# EAGLE board CompletePCB (3) (EAGLE 9.2.1)
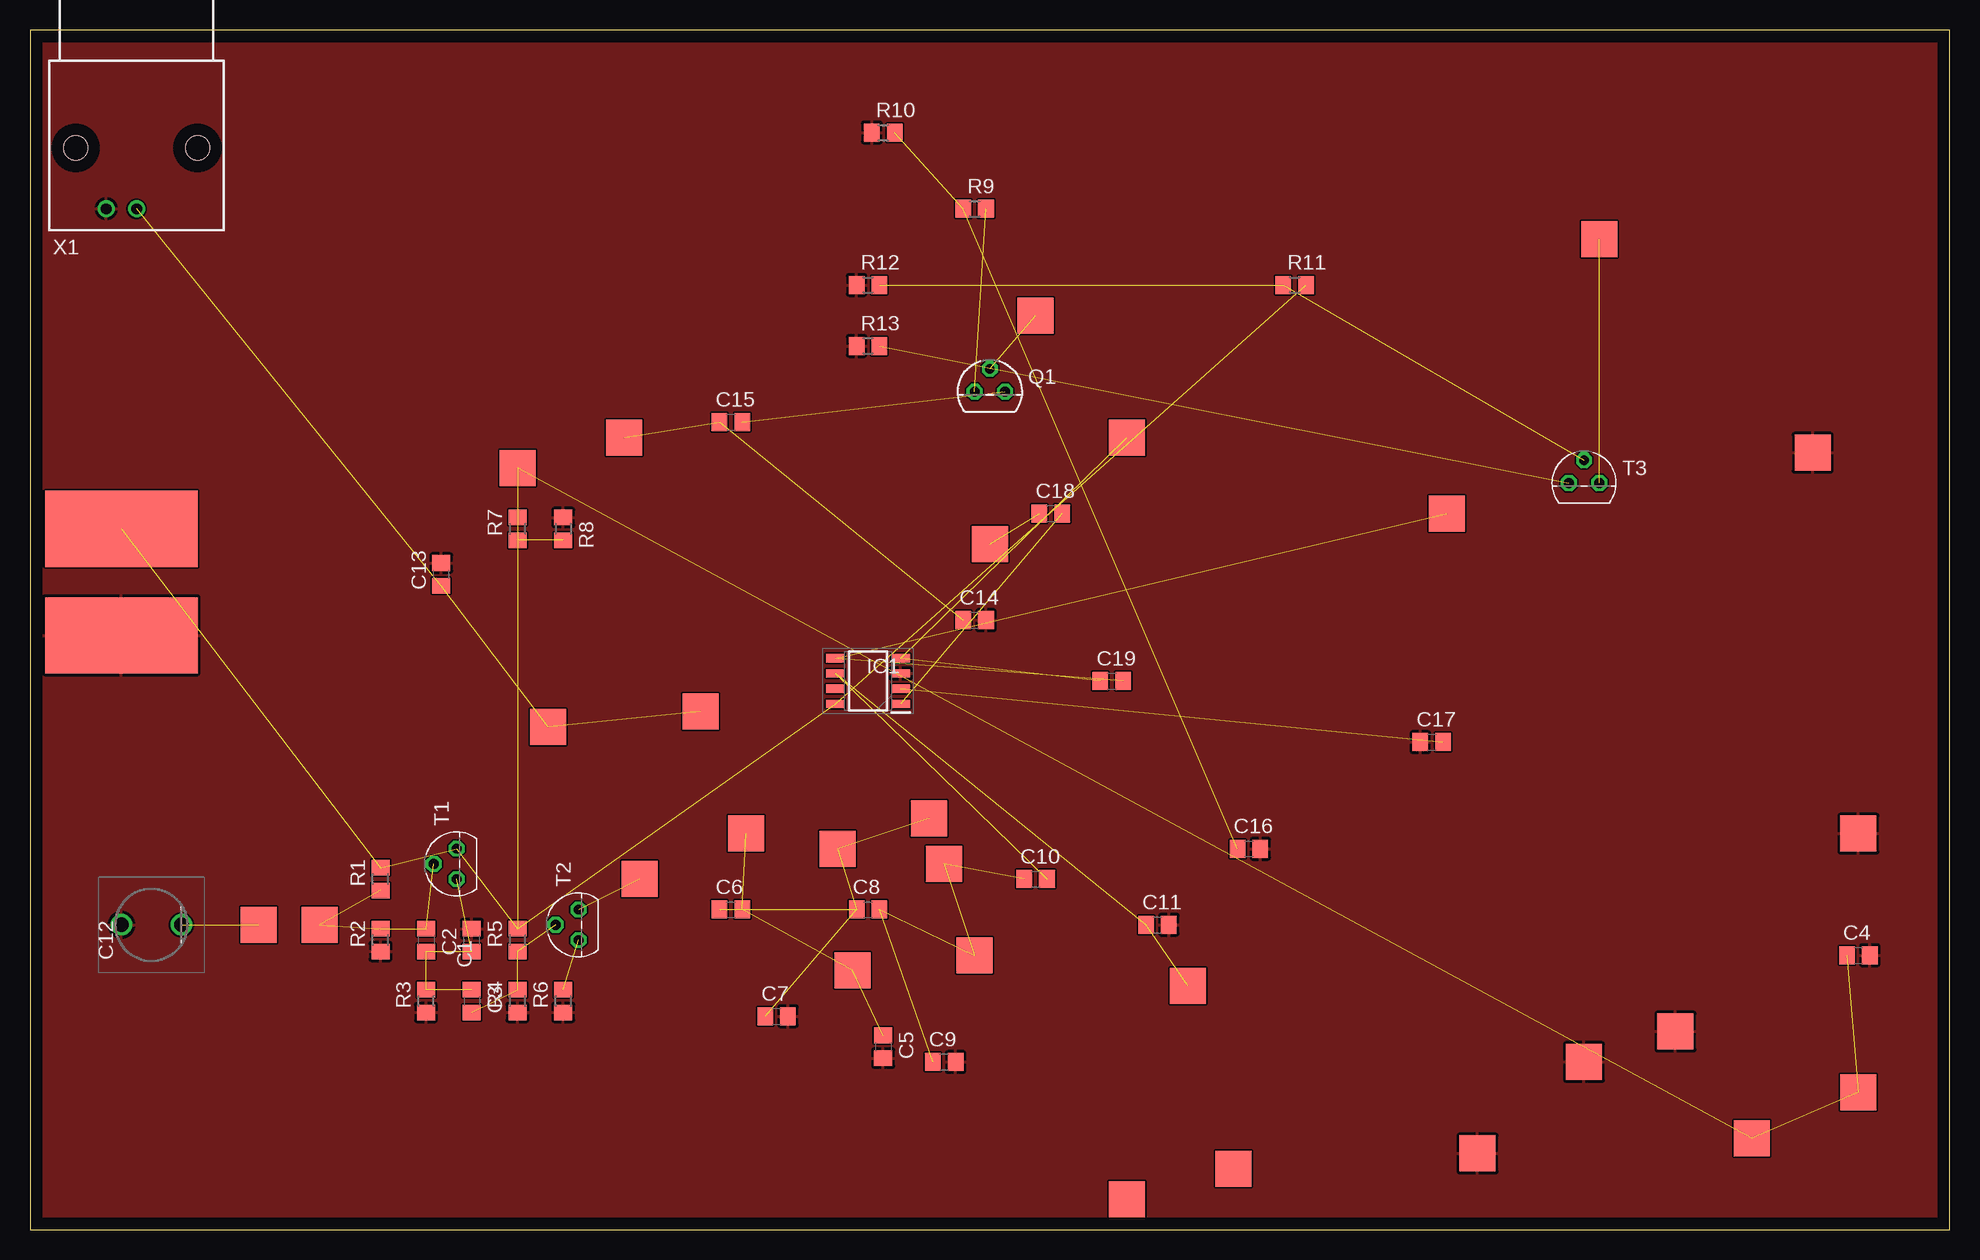
[diagram p0: board, top side]

Size 160 x 100 mm. Coordinates in mm from the lower left corner, seen from the top.
Outline: 0,0 160,0 160,100 0,100 0,0
Copper layers (1*16): Top 0.035mm / dielectric 1.5mm / Bottom 0.035mm
Design rules "default": minimum track width 6mil, minimum drill 0.35mm, track to track 6mil, track to pad 6mil, pad to pad 6mil, via to via 6mil, smd to smd 6mil, copper to edge 40mil, drill to drill 6mil, minimum pad ring 10mil, minimum via ring 8mil, stop-mask expansion 4mil, vias tented up to drill 0mil, thermal gap 10mil

## Footprints (pad centres in the part's own frame; a part is rotated, then mirrored left to right if it is on the bottom)
C0805 = smd 1.3 x 1.5: 1 -0.95,0; 2 0.95,0
GKG20015 = drill 1.2 pad 1.8: 1 0,0; 2 5,0
SOIC127P600X175-8N = smd 1.55 x 0.7: 1 -2.725,1.905; 2 -2.725,0.635; 3 -2.725,-0.635; 4 -2.725,-1.905; 5 2.725,-1.905; 6 2.725,-0.635; 7 2.725,0.635; 8 2.725,1.905
TO92C = drill 0.813 octagon: B 1.27,0; C 0,1.905; E -1.27,0
R0805 = smd 1.3 x 1.5: 1 -0.95,0; 2 0.95,0
TO92 = drill 0.813 octagon: 1 1.27,0; 2 0,1.905; 3 -1.27,0
PAD = smd 3 x 3: P$1 0,0
ALLIGATORCONNECTOR = smd 6.35 x 12.7: GND 7.62,2.54; VS -1.27,2.54
AMP_227161 = drill 0.9 pad 1.27: 1 0,-5.08; 2 -2.54,-5.08 | hole 2: -5.08,0; 5.08,0

## Placement (x,y rotation side)
C1  [C0805]  33.02,24.13 270 top
C2  [C0805]  36.83,24.13 90 top
C3  [C0805]  36.83,19.05 270 top
C4  [C0805]  152.4,22.86 0 top
C5  [C0805]  71.12,15.24 270 top
C6  [C0805]  58.42,26.67 0 top
C7  [C0805]  62.23,17.78 0 top
C8  [C0805]  69.85,26.67 0 top
C9  [C0805]  76.2,13.97 0 top
C10  [C0805]  83.82,29.21 0 top
C11  [C0805]  93.98,25.4 0 top
C12  GKG20015  [GKG20015]  7.62,25.4 0 top
C13  [C0805]  34.29,54.61 90 top
C14  [C0805]  78.74,50.8 0 top
C15  [C0805]  58.42,67.31 0 top
C16  [C0805]  101.6,31.75 0 top
C17  [C0805]  116.84,40.64 0 top
C18  [C0805]  85.09,59.69 0 top
C19  [C0805]  90.17,45.72 0 top
IC1  SA602AD_01,118  [SOIC127P600X175-8N]  69.85,45.72 180 top
Q1  2N3704  [TO92C]  80.01,69.85 0 top
R1  [R0805]  29.21,29.21 90 top
R2  [R0805]  29.21,24.13 90 top
R3  [R0805]  33.02,19.05 90 top
R4  [R0805]  40.64,19.05 90 top
R5  [R0805]  40.64,24.13 90 top
R6  [R0805]  44.45,19.05 90 top
R7  [R0805]  40.64,58.42 90 top
R8  [R0805]  44.45,58.42 270 top
R9  [R0805]  78.74,85.09 0 top
R10  [R0805]  71.12,91.44 0 top
R11  [R0805]  105.41,78.74 0 top
R12  [R0805]  69.85,78.74 0 top
R13  [R0805]  69.85,73.66 0 top
T1  2N3565  [TO92]  35.56,30.48 90 top
T2  2N3565  [TO92]  45.72,25.4 90 top
T3  2N3565  [TO92]  129.54,62.23 0 top
U$1  PAD  [PAD]  50.8,29.21 0 top
U$2  PAD  [PAD]  143.51,7.62 0 top
U$3  PAD  [PAD]  59.69,33.02 0 top
U$4  PAD  [PAD]  120.65,6.35 0 top
U$5  ALLIGATORCLIPS  [ALLIGATORCONNECTOR]  5.08,57.15 270 top
U$6  PAD  [PAD]  19.05,25.4 0 top
U$7  PAD  [PAD]  24.13,25.4 0 top
U$8  PAD  [PAD]  68.58,21.59 0 top
U$9  PAD  [PAD]  74.93,34.29 0 top
U$10  PAD  [PAD]  67.31,31.75 0 top
U$11  PAD  [PAD]  76.2,30.48 0 top
U$12  PAD  [PAD]  78.74,22.86 0 top
U$13  PAD  [PAD]  96.52,20.32 0 top
U$14  PAD  [PAD]  55.88,43.18 0 top
U$15  PAD  [PAD]  137.16,16.51 0 top
U$16  PAD  [PAD]  43.18,41.91 0 top
U$17  PAD  [PAD]  49.53,66.04 0 top
U$18  PAD  [PAD]  40.64,63.5 0 top
U$19  PAD  [PAD]  83.82,76.2 0 top
U$20  PAD  [PAD]  80.01,57.15 0 top
U$21  PAD  [PAD]  152.4,33.02 0 top
U$22  PAD  [PAD]  91.44,66.04 0 top
U$23  PAD  [PAD]  118.11,59.69 0 top
U$24  PAD  [PAD]  148.59,64.77 0 top
U$25  PAD  [PAD]  100.33,5.08 0 top
U$26  PAD  [PAD]  152.4,11.43 0 top
U$27  PAD  [PAD]  130.81,82.55 0 top
U$28  PAD  [PAD]  129.54,13.97 0 top
U$29  PAD  [PAD]  91.44,2.54 0 top
X1  1-227161-0  [AMP_227161]  8.89,90.17 0 top

## Library data of the parts
C1-C11 C13-C19 = eagle-ltspice; SPICEMODEL: NONE; SPICEPREFIX: C
C12 = SamacSys_Parts; DESCRIPTION: Trimmer / Variable Capacitors 5-20pF 100V 85 DEG; HEIGHT: 5.1mm; MANUFACTURER_NAME: Sprague Goodman; MANUFACTURER_PART_NUMBER: GKG20015; MOUSER_PART_NUMBER: 659-GKG20015; MOUSER_PRICE-STOCK: https://www.mouser.com/Search/Refine.aspx?Keyword=659-GKG20015
IC1 = SamacSys_Parts; DESCRIPTION: NXP - SA602AD/01,118 - DOUBLE-BALANCED MIXER, 500MHZ, SOIC-8; HEIGHT: 1.75mm; MANUFACTURER_NAME: NXP; MANUFACTURER_PART_NUMBER: SA602AD/01,118; MOUSER_PART_NUMBER: 771-SA602AD/01-T
Q1 = transistor-small-signal
R1-R13 = resistor
T1-T3 = transistor
U$1-U$29 = Custom
X1 = con-coax; MF: TYCO ELECTRONICS; MPN: 1-227161; OC_FARNELL: unknown; OC_NEWARK: 33B3200

## Nets
GND: C2.2 C4.2 C5.2 C7.2 C9.2 C11.2 C12.1 C13.2 C14.2 C16.2 C17.1 IC1.3 R2.1 R3.1 R4.1 R6.1 R8.1 R10.1 R12.1 R13.1 U$4.P$1 U$5.GND U$15.P$1 U$21.P$1 U$24.P$1 U$28.P$1 X1.2
N$1: R6.2 T2.3
N$2: C4.1 IC1.8 R1.2 R5.2 R7.2 R11.2 T1.1 U$2.P$1 U$5.VS U$18.P$1 U$26.P$1
N$3: C1.2 C2.1 C3.1 R3.2 T1.3
N$4: C1.1 R1.1 R2.2 T1.2 U$7.P$1
N$5: C3.2 R4.2 R5.1 T2.2
N$6: R13.2 T3.3
N$7: T2.1 U$1.P$1
N$8: C5.1 C6.2 U$3.P$1 U$8.P$1
N$9: Q1.E R9.2
N$10: C8.2 C9.1 C10.1 U$11.P$1 U$12.P$1
N$11: C10.2 C11.1 IC1.6 U$13.P$1
N$12: C12.2 U$6.P$1
N$13: C6.1 C7.1 C8.1 U$9.P$1 U$10.P$1
N$14: C16.1 R9.1 R10.2
N$15: C13.1 U$14.P$1 U$16.P$1 X1.1
N$16: C14.1 C15.1 U$17.P$1
N$17: C15.2 Q1.B
N$18: R7.1 R8.2
N$19: Q1.C U$19.P$1
N$20: C19.2 IC1.5 U$23.P$1
N$21: C19.1 IC1.4 U$22.P$1
N$22: C18.1 U$20.P$1
N$23: C17.2 IC1.2
N$24: C18.2 IC1.1
N$25: U$25.P$1
N$26: T3.1 U$27.P$1
N$27: R11.1 R12.2 T3.2
N$28: U$29.P$1

## Tracks (layer width: path | path; a pad name or v marks a point on that pad's centre or on a via)
GND
  pour Top: 0,100.33 161.29,100.33 161.29,0 0,0
N$1  (1 unrouted)
N$2  (10 unrouted)
N$3  (4 unrouted)
N$4  (4 unrouted)
N$5  (3 unrouted)
N$6  (1 unrouted)
N$7  (1 unrouted)
N$8  (3 unrouted)
N$9  (1 unrouted)
N$10  (4 unrouted)
N$11  (3 unrouted)
N$12  (1 unrouted)
N$13  (4 unrouted)
N$14  (2 unrouted)
N$15  (3 unrouted)
N$16  (2 unrouted)
N$17  (1 unrouted)
N$18  (1 unrouted)
N$19  (1 unrouted)
N$20  (2 unrouted)
N$21  (2 unrouted)
N$22  (1 unrouted)
N$23  (1 unrouted)
N$24  (1 unrouted)
N$26  (1 unrouted)
N$27  (2 unrouted)